# Altium PCB main.PcbDoc
Units mm, origin at the board's own origin, x right, y up, seen from the top; angles counter-clockwise.
Board outline 60 x 52 mm, 2 copper layers (Top Layer, Bottom Layer); 11 components, 7 nets, 20 pads, 1 vias.
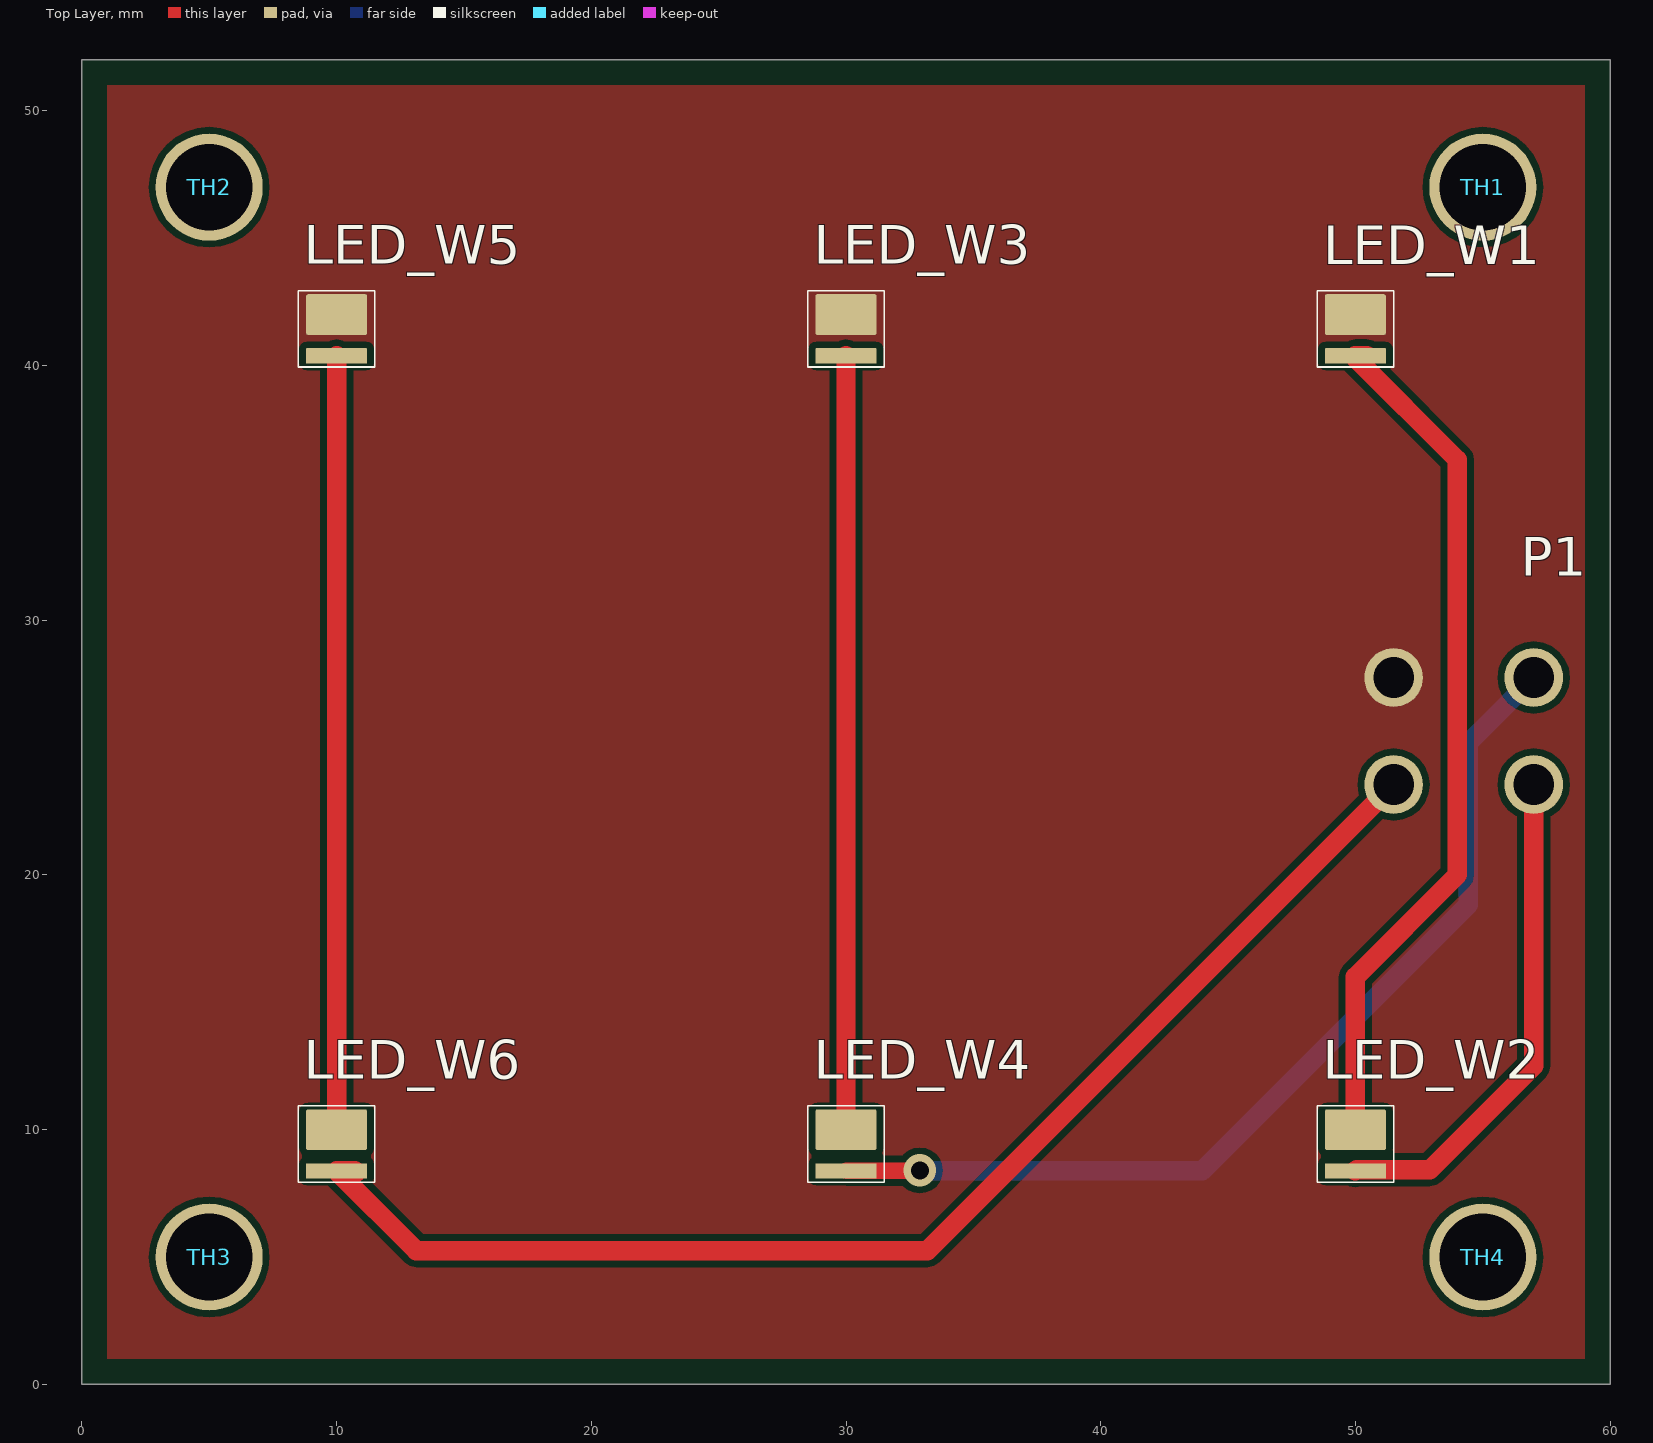
[diagram p0: Top Layer view]
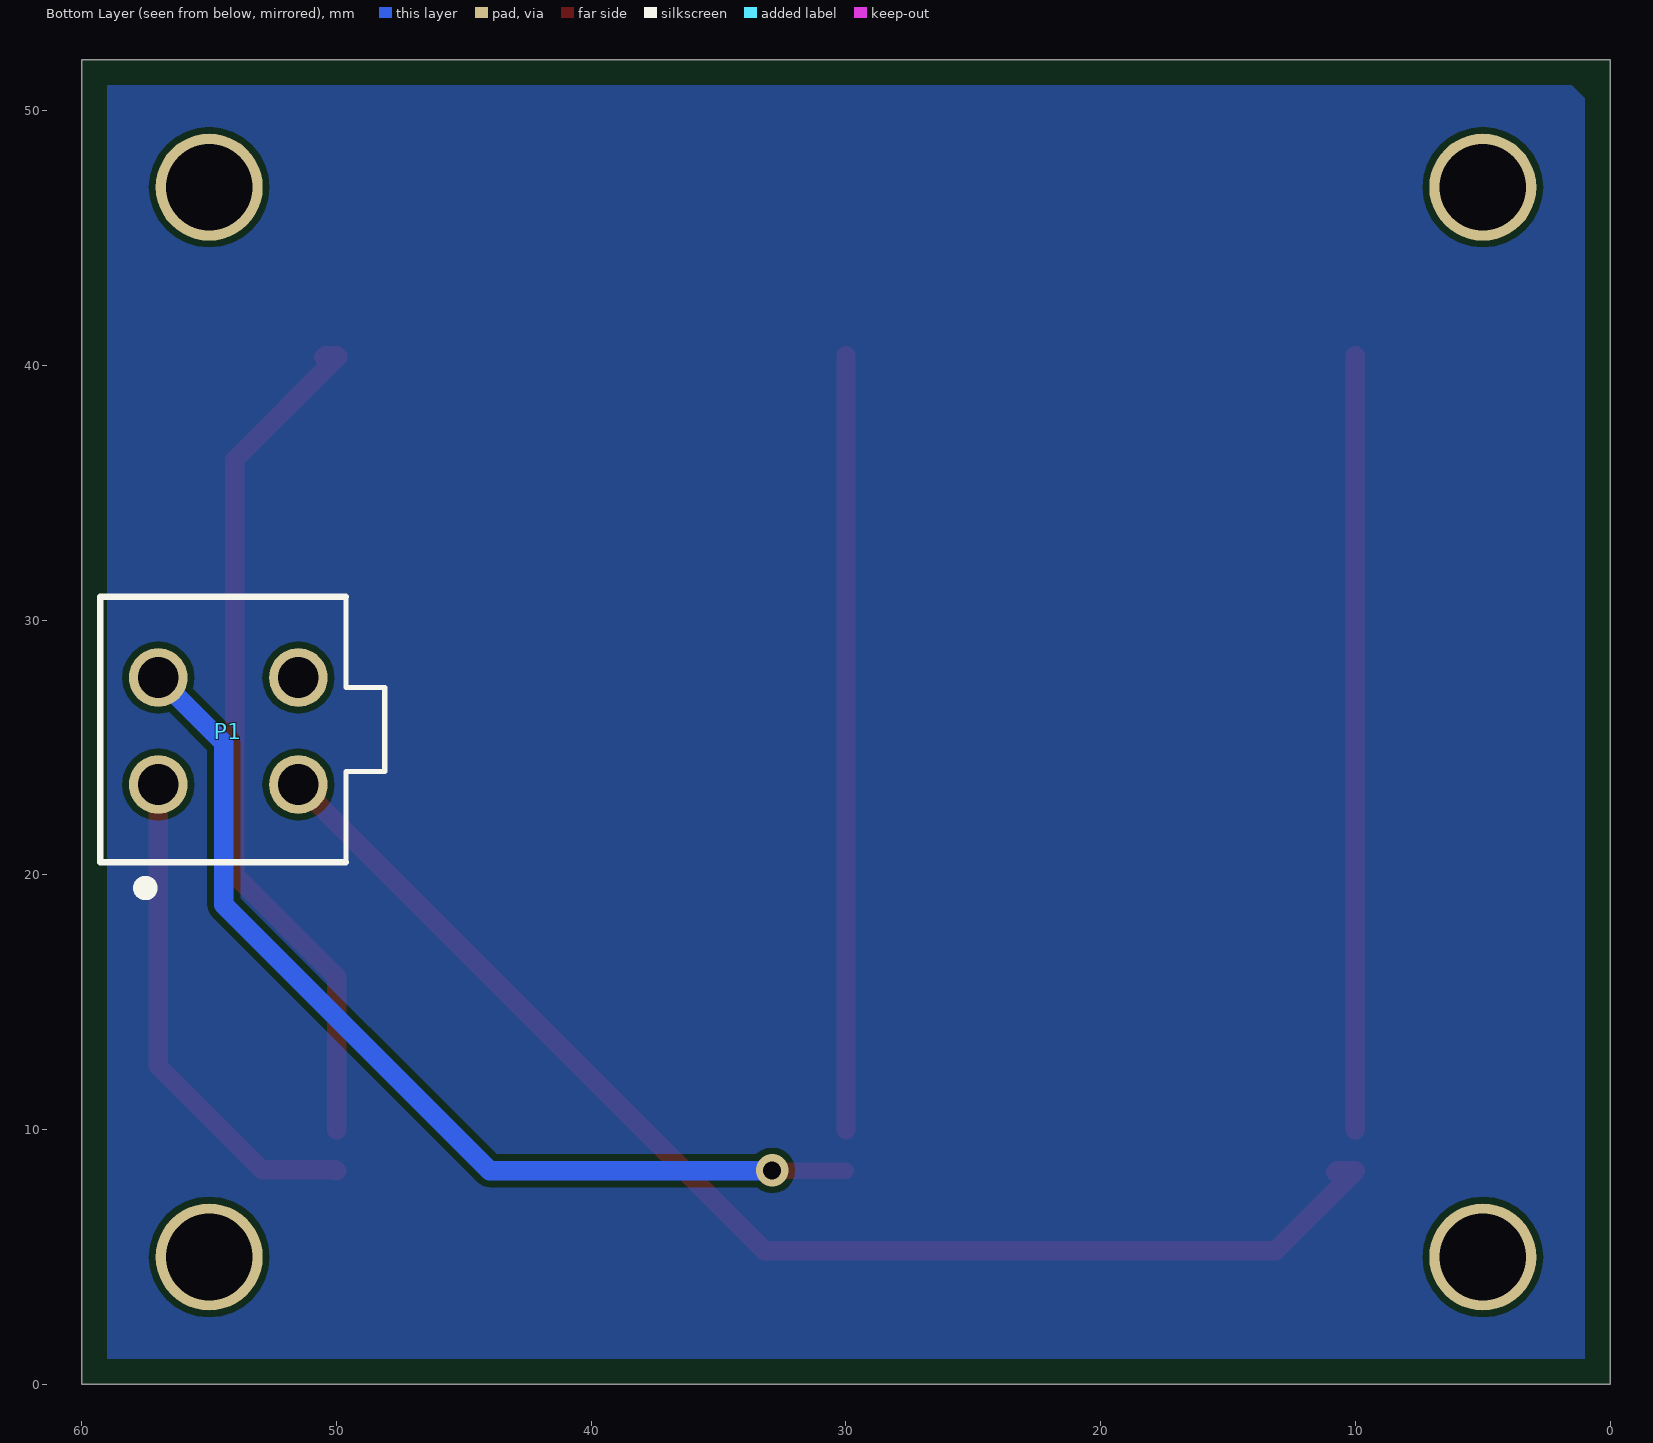
[diagram p1: Bottom Layer view, seen from below]

## Layer stack, top to bottom
Top Solder: solder mask 0.0102, Solder Resist, Dk 3.5
Top Layer: signal copper 0.0356
Dielectric 1: dielectric 0.32, FR-4, Dk 4.8
Bottom Layer: signal copper 0.0356
Bottom Solder: solder mask 0.0102, Solder Resist, Dk 3.5

## Board outline
0,52 60,52 60,0 0,0

## Design rules (kind name [scope] priority, off if disabled: settings)
Clearance [All] p1: gap=0.254 ignorepadtopadclearanceinfootprint=FALSE except(0: Arc-Hole Track-Hole SMDPad-Hole THPad-Hole Via-Hole Fill-Hole Poly-Hole Region-Hole Text-Hole)
PolygonConnect [All] p1: connectstyle=Relief reliefconductorwidth=0.254 reliefentries=4 polygonreliefangle="90 Angle" airgapwidth=0.254
RoutingVias [All] p1: holewidth=0.711 width=1.27 viastyle="Through Hole" minholewidth=0.711 minwidth=1.27 maxholewidth=0.711 maxwidth=1.27
SolderMaskExpansion [All] p1: expansion=0.102 istentingtop=FALSE
Width "Schematic Width Constraint_13" [InNet('NetLED_W4_2')] p1: maxlimit=1.524 minlimit=0.254 preferedwidth=0.762 minimp=50.000000 maximp=50.000000 favimp=50.000000
Width "Schematic Width Constraint_12" [InNet('NetLED_W2_2')] p2: maxlimit=1.524 minlimit=0.254 preferedwidth=0.762 minimp=50.000000 maximp=50.000000 favimp=50.000000
Width "Schematic Width Constraint_11" [InNet('NetLED_W5_2')] p3: maxlimit=1.524 minlimit=0.254 preferedwidth=0.762 minimp=50.000000 maximp=50.000000 favimp=50.000000
Width "Schematic Width Constraint_10" [InNet('GND')] p4: maxlimit=1.524 minlimit=0.254 preferedwidth=0.762 minimp=50.000000 maximp=50.000000 favimp=50.000000
Width "Schematic Width Constraint_9" [InNet('NetLED_W1_2')] p5: maxlimit=1.524 minlimit=0.254 preferedwidth=0.762 minimp=50.000000 maximp=50.000000 favimp=50.000000
Width "Schematic Width Constraint_8" [InNet('NetLED_W6_2')] p6: maxlimit=1.524 minlimit=0.254 preferedwidth=0.762 minimp=50.000000 maximp=50.000000 favimp=50.000000
Width "Schematic Width Constraint_7" [InNet('NetLED_W3_2')] p7: maxlimit=1.524 minlimit=0.254 preferedwidth=0.762 minimp=50.000000 maximp=50.000000 favimp=50.000000
Width [All] p8: maxlimit=0.254 minlimit=0.254 preferedwidth=0.254
30 further rules are at their usual default settings.

## Components (designator, comment, footprint, x,y, rotation, side; value= is the part's Value field where it differs from the comment)
LED_W1 "MP-3030-210H-40-95" MP-3030-210H-40-95 48.5,42.94 r270 top
LED_W2 "MP-3030-210H-40-95" MP-3030-210H-40-95 48.5,10.94 r270 top
LED_W3 "MP-3030-210H-40-95" MP-3030-210H-40-95 28.5,42.94 r270 top
LED_W4 "MP-3030-210H-40-95" MP-3030-210H-40-95 28.5,10.94 r270 top
LED_W5 "MP-3030-210H-40-95" MP-3030-210H-40-95 8.5,42.94 r270 top
LED_W6 "MP-3030-210H-40-95" MP-3030-210H-40-95 8.5,10.94 r270 top
P1 "Mini-Fit Jr 4 Pos" "MOLEX 0039281043" 57,23.55 r90 bottom
TH1 "m3 screw" m3screw#1 75.411,4.1 r0 top
TH2 "m3 screw" m3screw#2 5,47 r0 top
TH3 "m3 screw" m3screw#3 63.911,4.1 r0 top
TH4 "m3 screw" m3screw#4 69.411,4.1 r0 top

## Footprints (in the part's own frame and the unit in brackets; to place one, negate y for a bottom-side part, rotate by r counter-clockwise, add the part's x,y. Pads: shape width x height; smd on the part's side, far side on the other; paste and mask are expansions set on the pad)
m3screw#1 [mm]
  round 4.2 hole 3.4: 0(-20.411,42.9)
m3screw#2 [mm]
  round 4.2 hole 3.4: 0(0,0)
m3screw#3 [mm]
  round 4.2 hole 3.4: 0(-58.911,0.9)
m3screw#4 [mm]
  round 4.2 hole 3.4: 0(-14.411,0.9)
"MOLEX 0039281043" [mm] "Connector Header Through Hole 4 position 0.165\" (4.20mm)"
  round 2.3 hole 1.6: 1(0,0) 2(4.2,0) 3(0,-5.5) 4(4.2,-5.5)
  silkscreen extent -4.24,-8.89 7.37,2.29, body extent -3.07,-8.82 7.33,2.18, height 12.8
MP-3030-210H-40-95 [mm] "3030SMT LED"
  rrect10% 1.6x2.4 smd mask+0.025: 1(0.94,1.5)
  rrect10% 0.6x2.4 smd mask+0.025: 2(2.56,1.5)
  silkscreen extent 0,0 3,3

## Part data
LED_W1 LED_W2 LED_W3 LED_W4 LED_W5 LED_W6: "White 4000K neutral 1.5W 95CRI SMT3030 LED 6V 150mA"
P1: library part "Molex 0039281043", "Mini-Fit Jr. Header, Dual Row, Right-Angle, with Snap-in Plastic Peg PCB Lock, 6 Circuits, PA Polyamide Nylon 6/6 94V-2, 0.76µm Select Gold (Au) Plating"

## Via types
v1: diameter 1.27, hole 0.711, Top Layer to Bottom Layer, 1 vias

## Nets (pads, with @x,y where several pads share a name; then routed paths per layer and width w, separated by ;. In a path a pad name is that pad's centre, name@x,y a point inside that pad or via, vN(x,y) a via of type N, cw(c..) or ccw(c..) an arc to the next point about the centre after c; other vN are vias at no path point)
GND: LED_W1.1 LED_W3.1 LED_W5.1 P1.4
NetLED_W1_2: LED_W1.2 LED_W2.1 | length 34.2
  Top Layer w0.762: LED_W1.2@49.96,40.34 54,36.3 54,20 50,16 LED_W2.1 ; LED_W1.2 50.454,40.38 LED_W1.2@50.5,40.334
NetLED_W2_2: LED_W2.2 P1.1 | length 19.8
  Top Layer w0.762: LED_W2.2 50.046,8.426 52.926,8.426 57,12.5 P1.1
NetLED_W3_2: LED_W3.2 LED_W4.1 | length 30.4
  Top Layer w0.762: LED_W4.1 LED_W3.2
NetLED_W4_2: LED_W4.2 P1.2 | length 38.8
  Top Layer w0.508: LED_W4.2 LED_W4.2@30.01,8.39 ; v1@32.89,8.39 v1(32.9,8.4)
  Top Layer w0.635: LED_W4.2@30.01,8.39 v1@32.89,8.39
  Bottom Layer w0.762: v1@32.9,8.38 43.98,8.38 54.422,18.822 54.422,25.172 P1.2
NetLED_W5_2: LED_W5.2 LED_W6.1 | length 30.4
  Top Layer w0.762: LED_W6.1 LED_W5.2
NetLED_W6_2: LED_W6.2 P1.3 | length 51.2
  Top Layer w0.762: LED_W6.2@10.764,8.334 10.718,8.38 LED_W6.2 13.13,5.25 33.2,5.25 P1.3
pads on no net: TH1.0 TH2.0 TH3.0 TH4.0

## Polygon pours and split planes (outlines as drawn)
GND on Top Layer "GND_L01_P000" (solid, pour order 0): 1,51 59,51 59,1 1,1
no net on Bottom Layer "NONET_L02_P002" (solid, pour order 2): 1,50.5 1.5,51 59,51 59,1 1,1